# Altium PCB ECUEXT1_23.PcbDoc
Units mm, origin at the board's own origin, x right, y up, seen from the top; angles counter-clockwise.
Board outline 56 x 44.32 mm, 2 copper layers (Top Layer, Bottom Layer); 17 components, 22 nets, 110 pads, 12 vias.
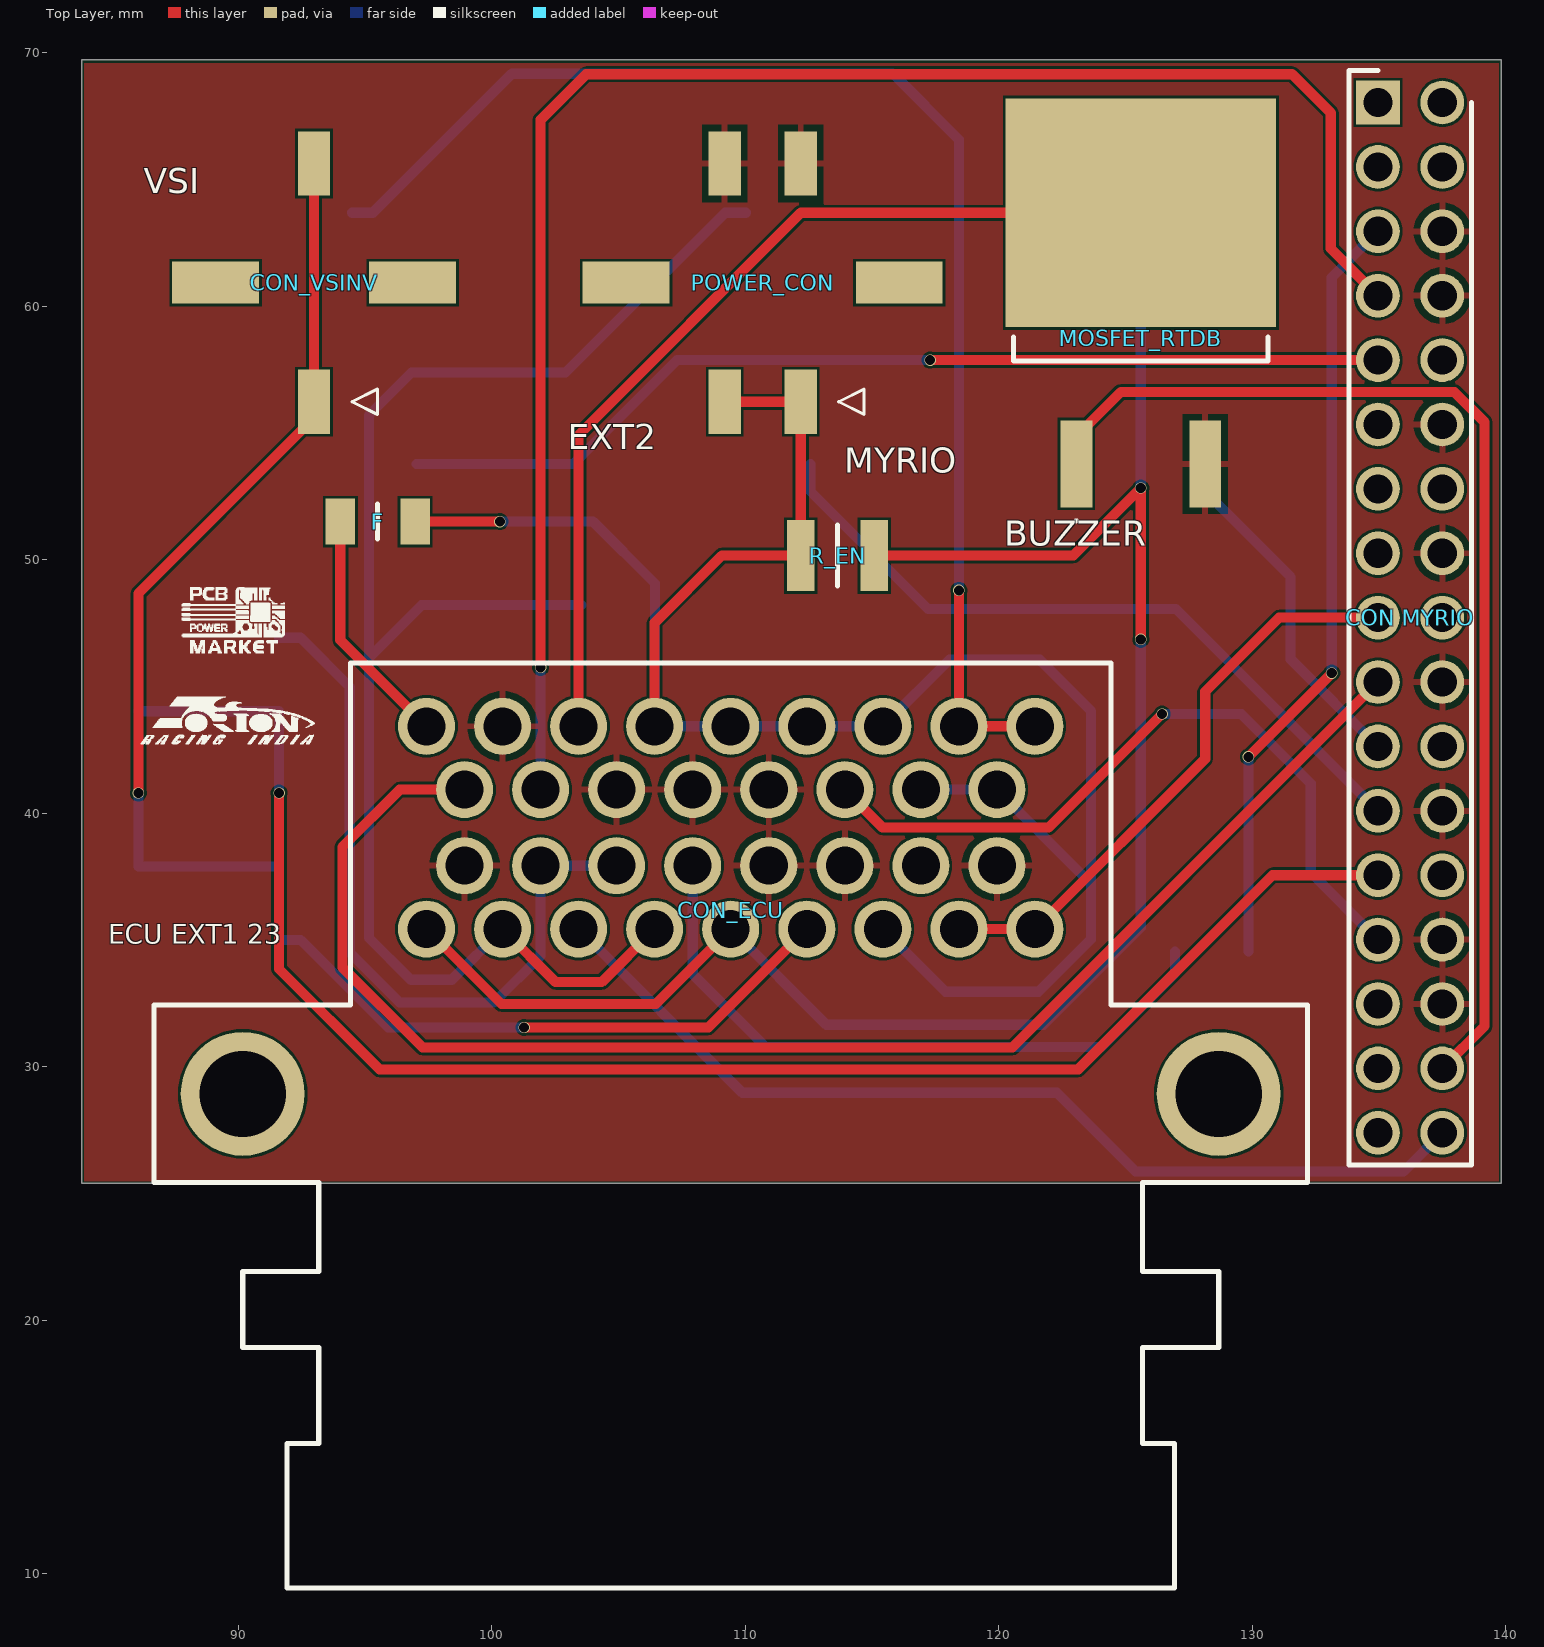
[diagram p0: Top Layer view]
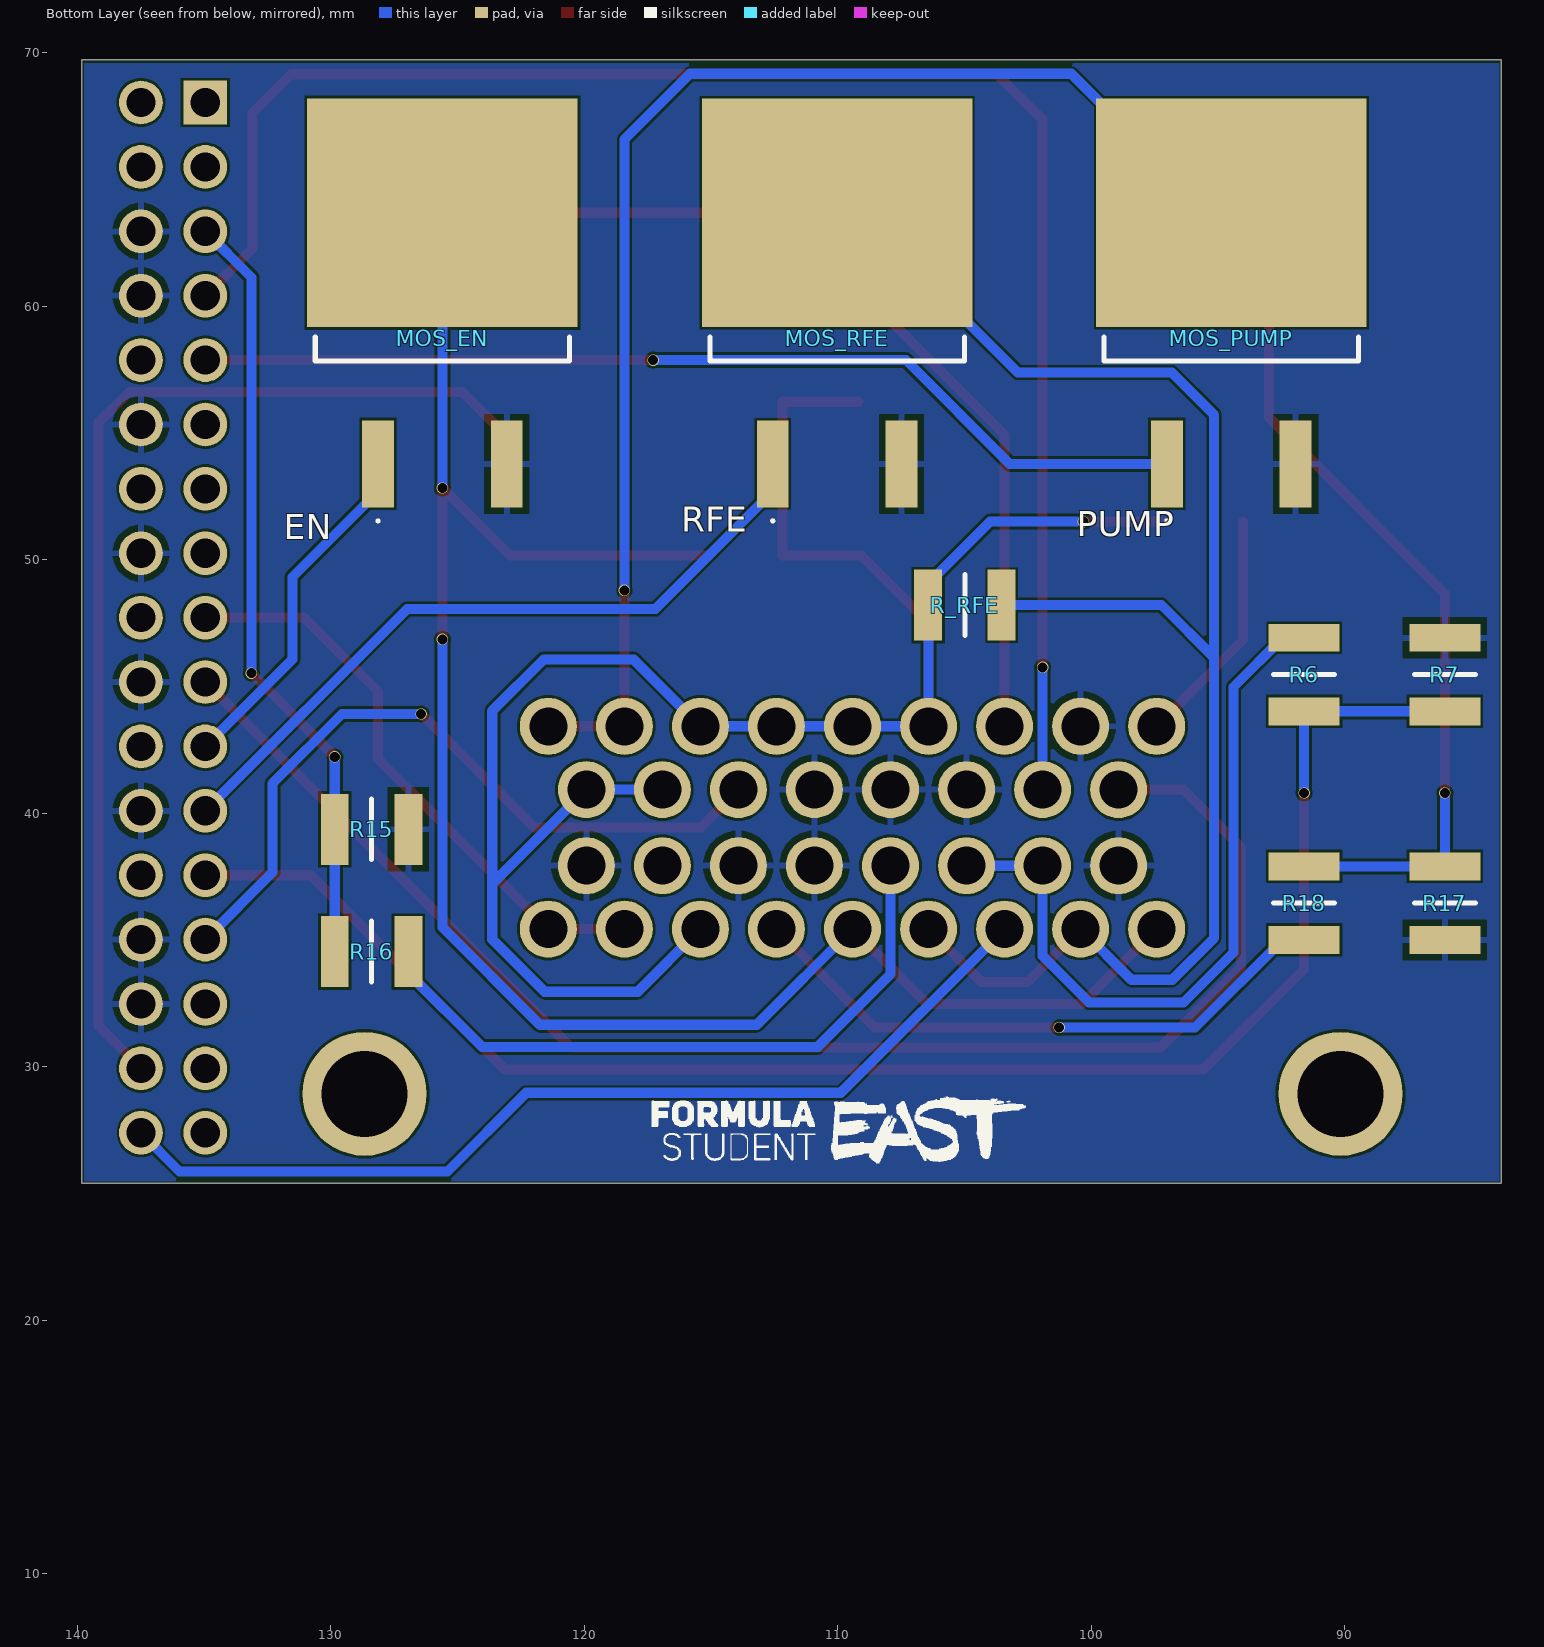
[diagram p1: Bottom Layer view, seen from below]
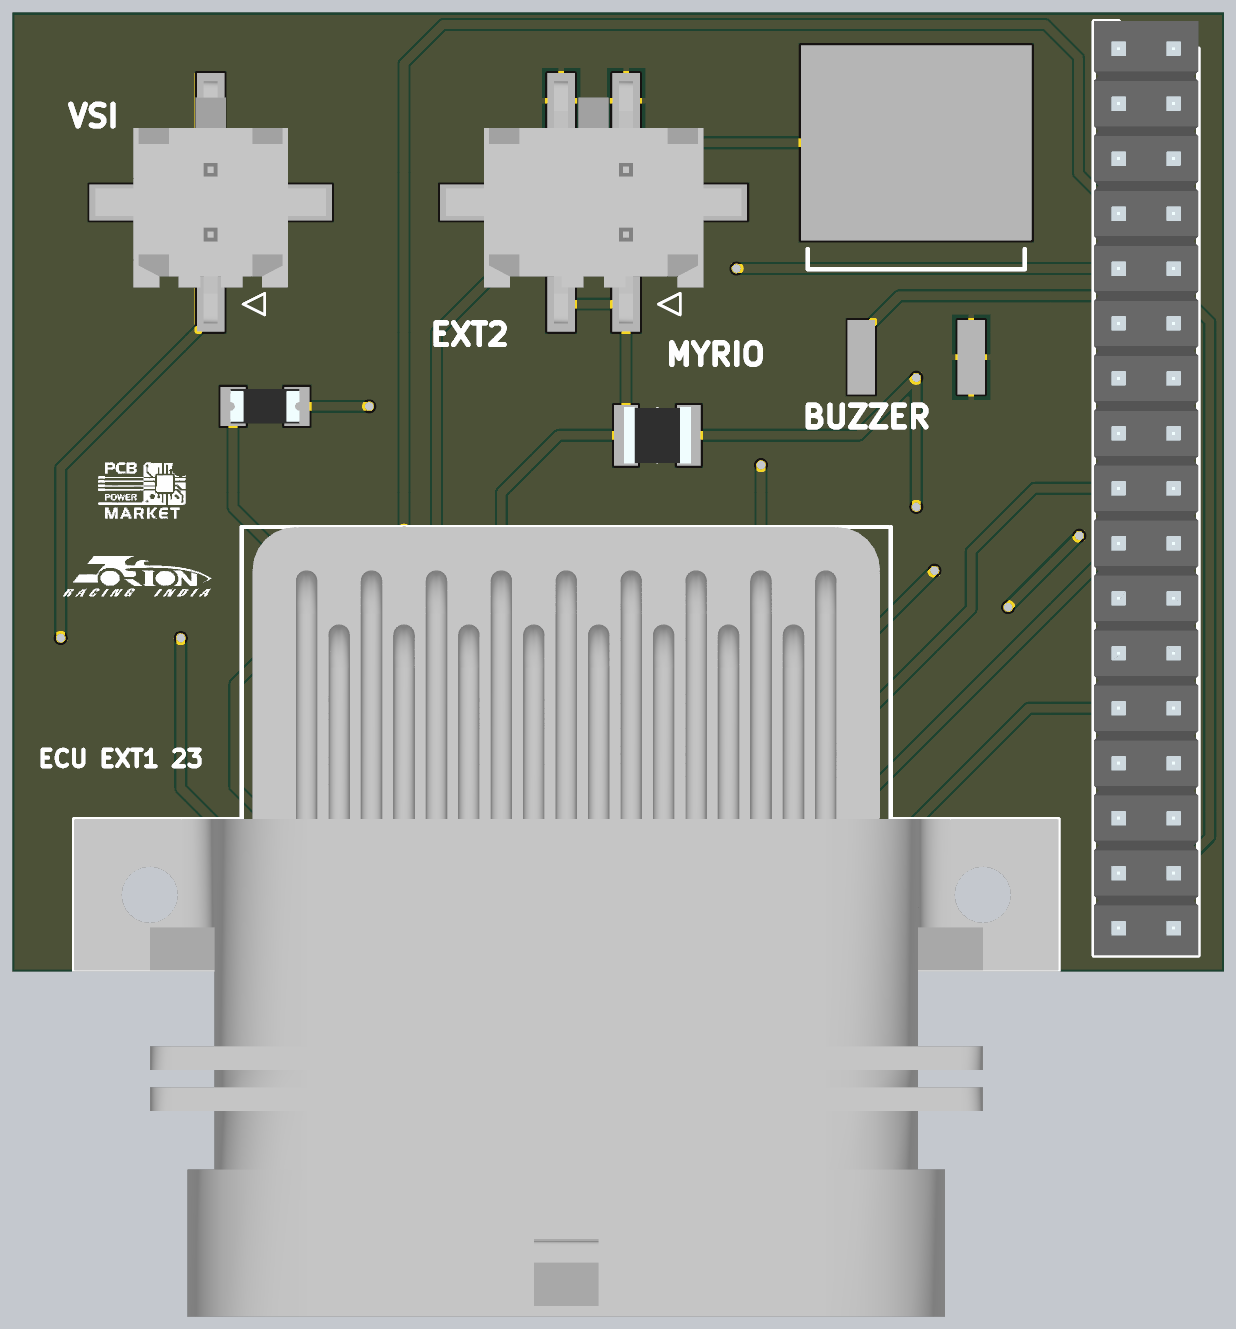
[diagram p2: 3D render of the assembled board from above, using the file's embedded part models]
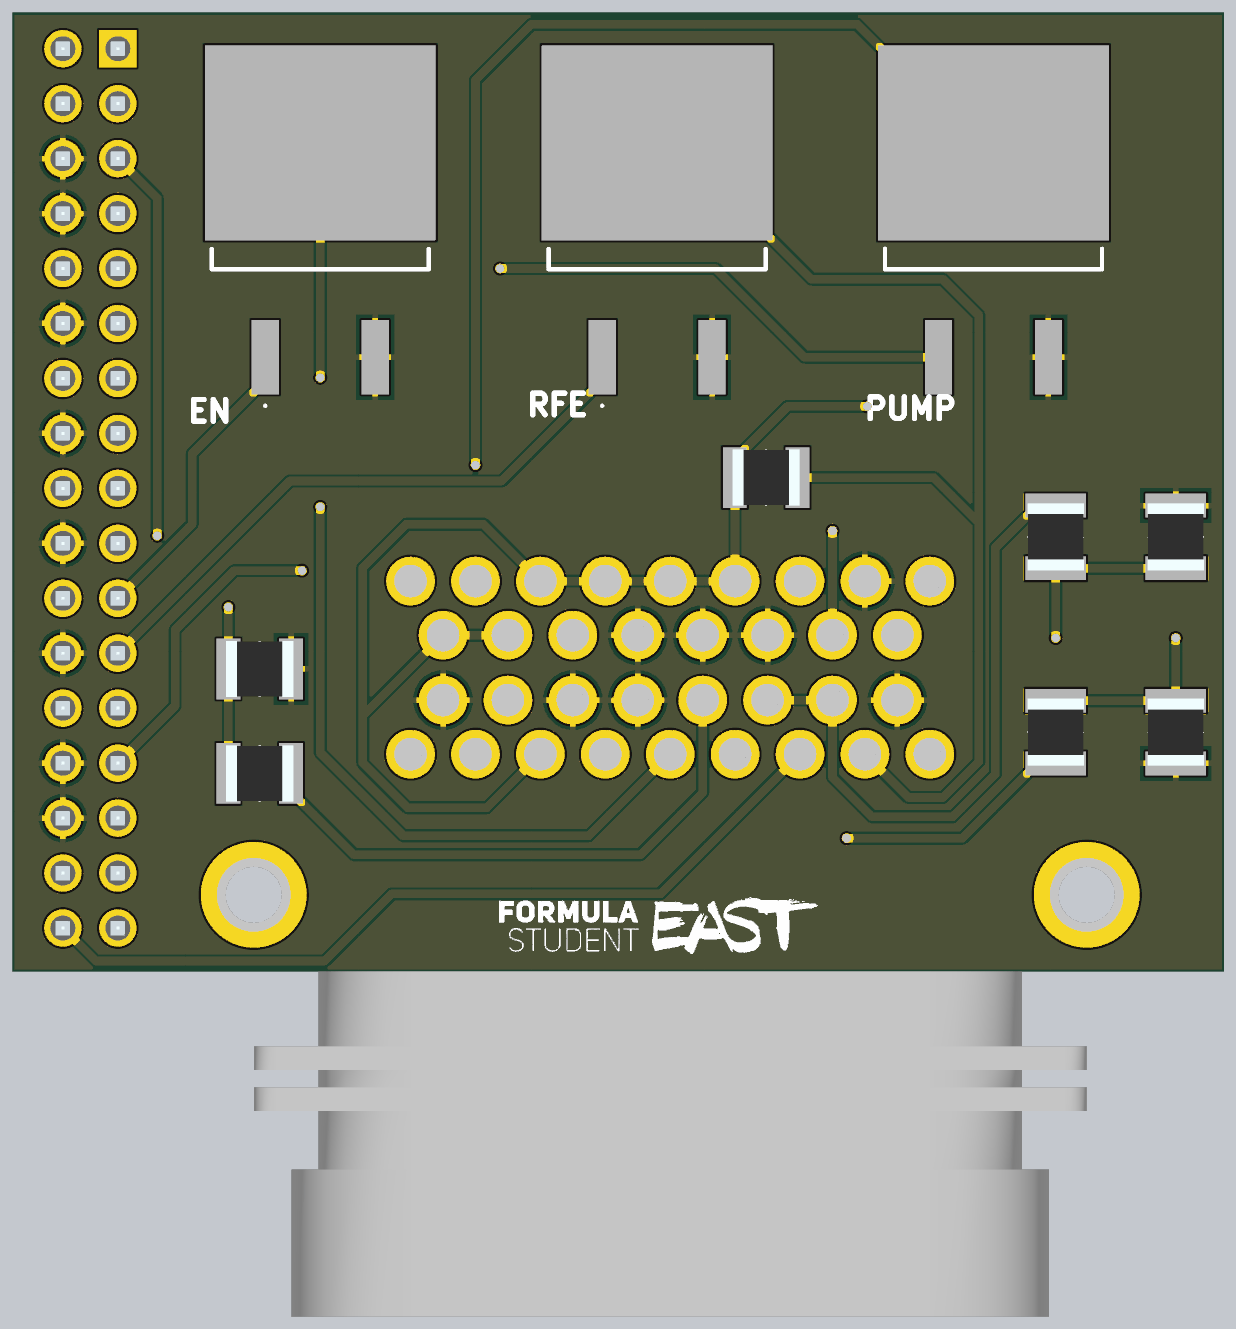
[diagram p3: 3D render of the assembled board from below, using the file's embedded part models]

## Layer stack, top to bottom
Top Solder: solder mask 0.0102, Solder Resist, Dk 3.5
Top Layer: signal copper 0.0356
Dielectric 1: dielectric 0.32, FR-4, Dk 4.8
Bottom Layer: signal copper 0.0356
Bottom Solder: solder mask 0.0102, Solder Resist, Dk 3.5

## Board outline
83.828,25.4 139.827,25.4 139.827,69.723 83.828,69.723

## Design rules (kind name [scope] priority, off if disabled: settings)
Clearance [All] p1: gap=0.1 ignorepadtopadclearanceinfootprint=FALSE
PolygonConnect [All] p1: connectstyle=Relief reliefconductorwidth=0.254 reliefentries=4 polygonreliefangle="90 Angle" airgapwidth=0.254
RoutingVias [All] p1: holewidth=0.4 width=0.45 viastyle="Through Hole" minholewidth=0.4 minwidth=0.45 maxholewidth=0.4 maxwidth=0.45
SolderMaskExpansion [All] p1: expansion=0.102 istentingtop=FALSE
Width [All] p1: maxlimit=0.5 minlimit=0.4 preferedwidth=0.4 minimp=50.000000 maximp=50.000000 favimp=50.000000
30 further rules are at their usual default settings.

## Components (designator, comment, footprint, x,y, rotation, side; value= is the part's Value field where it differs from the comment)
"CON MYRIO" "67997-234HLF" HDRV34W67P254_2X17_4318X483X858P 134.955,68.038 r270 top
CON_ECU "6437288-1" 6437288-1 109.426,45.933 r0 top
CON_VSINV "43045-0218" 43045-02YY_181920 92.989,60.934 r0 top
F "NANOSMDC020F-2" NANOSMDC016F2 95.5,51.507 r0 top
MOS_EN "SUM40010EL-GE3" SUM40010ELGE3 125.602,62.418 r180 bottom
MOS_PUMP "SUM40010EL-GE3" SUM40010ELGE3 94.484,62.418 r180 bottom
MOS_RFE "SUM40010EL-GE3" SUM40010ELGE3 110.031,62.418 r180 bottom
MOSFET_RTDB "SUM40010EL-GE3" SUM40010ELGE3 125.602,62.418 r0 top
POWER_CON "43045-0419" 43045-04YY_181920 110.688,60.934 r0 top
R6 "3.3k" RESC3126X60N 91.609,45.473 r90 bottom
R7 "2.2k" RESC3126X60N 86.06,45.473 r270 bottom
R15 "RC1210JR-0710KL" RESC3126X60N 128.397,39.37 r0 bottom
R16 "RC1210JR-0710KL" RESC3126X60N 128.397,34.544 r180 bottom
R17 "RC1210JR-0710KL" RESC3126X60N 86.06,36.455 r90 bottom
R18 "RC1210JR-0710KL" RESC3126X60N 91.609,36.455 r270 bottom
R_EN "10k" RESC3126X60N 113.638,50.168 r0 top
R_RFE "10k" RESC3126X60N 104.992,48.215 r180 bottom

## Footprints (in the part's own frame and the unit in brackets; to place one, negate y for a bottom-side part, rotate by r counter-clockwise, add the part's x,y. Pads: shape width x height; smd on the part's side, far side on the other; paste and mask are expansions set on the pad)
43045-02YY_181920 [mm]
  rect 1.27x2.54 smd: 1(0,-4.7) 2(0,4.7)
  rect 3.43x1.65 smd: 3(3.885,0) 4(-3.885,0)
  silkscreen extent 1.5,-5.2 2.5,-4.2, body extent -5.33,-5.6 5.33,5.6, height 9.96
43045-04YY_181920 [mm]
  rect 1.27x2.54 smd: 1(1.5,-4.7) 2(-1.5,-4.7) 3(1.5,4.7) 4(-1.5,4.7)
  rect 3.43x1.65 smd: 5(5.385,0) 6(-5.385,0)
  silkscreen extent 3,-5.2 4,-4.2, body extent -6.83,-5.6 6.83,5.6, height 9.96
6437288-1 [mm]
  round 2.25 hole 1.5: 1(-12,-2.5) 2(-9,-2.5) 3(-6,-2.5) 4(-3,-2.5) 5(0,-2.5) 6(3,-2.5) 7(6,-2.5) 8(9,-2.5) 9(12,-2.5) 10(-10.5,-5) 11(-7.5,-5) 12(-4.5,-5) 13(-1.5,-5) 14(1.5,-5) 15(4.5,-5) 16(7.5,-5) 17(10.5,-5) 18(-10.5,-8) 19(-7.5,-8) 20(-4.5,-8) 21(-1.5,-8) 22(1.5,-8) 23(4.5,-8) 24(7.5,-8) 25(10.5,-8) 26(-12,-10.5) 27(-9,-10.5) 28(-6,-10.5) 29(-3,-10.5) 30(0,-10.5) 31(3,-10.5) 32(6,-10.5) 33(9,-10.5) 34(12,-10.5)
  round 4.89 hole 3.4: 35(19.25,-17) 36(-19.25,-17)
  silkscreen extent -22.75,-36.5 22.75,0, body extent -22.75,-36.5 22.75,0, height 28.16
HDRV34W67P254_2X17_4318X483X858P [mm]
  rect 1.725x1.725 hole 1.15: 1(0,0)
  round 1.725 hole 1.15: 2(0,2.54) 3(2.54,0) 4(2.54,2.54) 5(5.08,0) 6(5.08,2.54) 7(7.62,0) 8(7.62,2.54) 9(10.16,0) 10(10.16,2.54) 11(12.7,0) 12(12.7,2.54) 13(15.24,0) 14(15.24,2.54) 15(17.78,0) 16(17.78,2.54) 17(20.32,0) 18(20.32,2.54) 19(22.86,0) 20(22.86,2.54) 21(25.4,0) 22(25.4,2.54) 23(27.94,0) 24(27.94,2.54) 25(30.48,0) 26(30.48,2.54) 27(33.02,0) 28(33.02,2.54) 29(35.56,0) 30(35.56,2.54) 31(38.1,0) 32(38.1,2.54) 33(40.64,0) 34(40.64,2.54)
  silkscreen extent -1.27,-1.14 41.91,3.68, body extent -1.27,-1.14 41.91,3.68, height 8.58
NANOSMDC016F2 [mm]
  rect 1.16x1.81 smd: 1(-1.475,0) 2(1.475,0)
  silkscreen extent 0,-0.69 0,0.69, body extent -1.6,-0.79 1.6,0.79, height 0.82
RESC3126X60N [mm]
  rect 1.1x2.8 smd: 1(-1.45,0) 2(1.45,0)
  silkscreen extent 0,-1.2 0,1.2, body extent -1.55,-1.3 1.55,1.3, height 0.6
SUM40010ELGE3 [mil]
  rect 49.49x135 smd: 1(-100,-340) 3(100,-340)
  rect 420x355 smd: 2(0,50)
  silkscreen extent -197,-430 198,-143

## Part data
"CON MYRIO": "Connector", Manufacturer_Name=Amphenol, Mouser Part Number=649-67997-234HLF, Arrow Part Number=67997-234HLF, Arrow Price/Stock=https://www.arrow.com/en/products/67997-234hlf/amphenol-fci?region=nac, Datasheet Link=https://cdn.amphenol-icc.com/media/wysiwyg/files/drawing/67996.pdf, Height=8.58mm, Manufacturer_Part_Number=67997-234HLF, Mouser Price/Stock=https://www.mouser.co.uk/ProductDetail/Amphenol-FCI/67997-234HLF?qs=zh4O8xspOuxBU73L6U2QCQ%3D%3D
CON_ECU: "Connector", Manufacturer_Name="TE Connectivity", Mouser Part Number=571-6437288-1, Arrow Part Number=6437288-1, Arrow Price/Stock=https://www.arrow.com/en/products/6437288-1/te-connectivity, Datasheet Link=http://www.te.com/commerce/DocumentDelivery/DDEController?Action=srchrtrv&DocNm=6437288-1&DocType=Customer+Drawing&DocLang=Japanese, Manufacturer_Part_Number=6437288-1, Mouser Price/Stock=https://www.mouser.co.uk/ProductDetail/TE-Connectivity/6437288-1?qs=WBj8811fzwGYtKR8aBSJZw%3D%3D
CON_VSINV: "Connector", Manufacturer_Name=Molex, Mouser Part Number=538-43045-0218, Arrow Part Number=43045-0218, Arrow Price/Stock=https://www.arrow.com/en/products/43045-0218/molex, Datasheet Link=https://www.molex.com/pdm_docs/sd/430450218_sd.pdf, Height=9.91mm, Manufacturer_Part_Number=43045-0218, Mouser Price/Stock=https://www.mouser.co.uk/ProductDetail/Molex/43045-0218?qs=4XSMV6Twtb2qUKINalLbdA%3D%3D
F: "Resettable Fuse", Manufacturer_Name=LITTELFUSE, Mouser Part Number=650-NANOSMDC020F-2, Arrow Part Number=NANOSMDC020F-2, Arrow Price/Stock=https://www.arrow.com/en/products/nanosmdc020f-2/littelfuse, Datasheet Link=https://www.littelfuse.com/~/media/electronics/datasheets/resettable_ptcs/littelfuse_ptc_nanosmdc_datasheet.pdf.pdf, Height=1mm, Manufacturer_Part_Number=NANOSMDC020F-2, Mouser Price/Stock=https://www.mouser.co.uk/ProductDetail/Littelfuse/NANOSMDC020F-2?qs=iK0evp%252BCRRU6agwMt7HYjg%3D%3D
MOS_EN MOS_PUMP MOS_RFE MOSFET_RTDB: "MOSFET (N-Channel)", Manufacturer_Name=Vishay, Mouser Part Number=78-SUM40010EL-GE3, Arrow Part Number=SUM40010EL-GE3, Arrow Price/Stock=https://www.arrow.com/en/products/sum40010el-ge3/vishay, Datasheet Link=https://www.vishay.com/docs/66984/sum40010el.pdf, Height=5.08mm, Manufacturer_Part_Number=SUM40010EL-GE3, Mouser Price/Stock=https://www.mouser.com/Search/Refine.aspx?Keyword=78-SUM40010EL-GE3
POWER_CON: "Connector", Manufacturer_Name=Molex, Mouser Part Number=538-43045-0419, Datasheet Link=https://www.molex.com/pdm_docs/sd/430450218_sd.pdf, Height=9.91mm, Manufacturer_Part_Number=43045-0419, Mouser Price/Stock=https://www.mouser.co.uk/ProductDetail/Molex/43045-0419?qs=UeCeOHRHQebVNIQyI9VWWg%3D%3D
R6 R7 R_EN R_RFE: library part RC1210JR-0710KL, "Resistor", Manufacturer_Name="YAGEO (PHYCOMP)", Mouser Part Number=603-RC1210JR-0710KL, Arrow Part Number=RC1210JR-0710KL, Arrow Price/Stock=https://www.arrow.com/en/products/rc1210jr-0710kl/yageo, Datasheet Link=https://datasheet.datasheetarchive.com/originals/distributors/Datasheets_SAMA/902f9e387b938f871d31120f5fc1d65e.pdf, Height=0.6mm, Manufacturer_Part_Number=RC1210JR-0710KL, Mouser Price/Stock=https://www.mouser.co.uk/ProductDetail/YAGEO/RC1210JR-0710KL?qs=6sj9KdP9svgfoubno5Jb%252BA%3D%3D
R15 R16 R17 R18: "Resistor", Manufacturer_Name="YAGEO (PHYCOMP)", Mouser Part Number=603-RC1210JR-0710KL, Arrow Part Number=RC1210JR-0710KL, Arrow Price/Stock=https://www.arrow.com/en/products/rc1210jr-0710kl/yageo, Datasheet Link=https://datasheet.datasheetarchive.com/originals/distributors/Datasheets_SAMA/902f9e387b938f871d31120f5fc1d65e.pdf, Height=0.6mm, Manufacturer_Part_Number=RC1210JR-0710KL, Mouser Price/Stock=https://www.mouser.co.uk/ProductDetail/YAGEO/RC1210JR-0710KL?qs=6sj9KdP9svgfoubno5Jb%252BA%3D%3D

## Via types
v1: diameter 0.45, hole 0.4, Top Layer to Bottom Layer, 12 vias

## Nets (pads, with @x,y where several pads share a name; then routed paths per layer and width w, separated by ;. In a path a pad name is that pad's centre, name@x,y a point inside that pad or via, vN(x,y) a via of type N, cw(c..) or ccw(c..) an arc to the next point about the centre after c; other vN are vias at no path point)
+12: CON_ECU.4 CON_ECU.5 CON_ECU.6 CON_ECU.7 CON_ECU.16 CON_ECU.17 CON_ECU.32 F.2 POWER_CON.1 POWER_CON.2 R_EN.1 R_RFE.1 | length 82.6
  Top Layer w0.4: F.2 v1(100.319,51.507) ; CON_ECU.4 106.426,47.517 109.077,50.168 R_EN.1 POWER_CON.1 ; POWER_CON.2 POWER_CON.1
  Bottom Layer w0.4: v1(100.319,51.507) 104,51.507 106.442,49.065 R_RFE.1 106.434,48.207 106.434,43.441 CON_ECU.4 CON_ECU.5 CON_ECU.6 CON_ECU.7 118.054,46.061 121.616,46.061 123.636,44.041 123.636,37.223 ; CON_ECU.32 117.899,32.96 121.57,32.96 123.636,35.026 123.636,37.223 ; CON_ECU.16 CON_ECU.17 123.636,37.223
AI2: "CON MYRIO.27" CON_ECU.15 | length 29.2
  Top Layer w0.4: CON_ECU.15 115.423,39.436 121.961,39.436 v1(126.441,43.917)
  Bottom Layer w0.4: v1(126.441,43.917) 129.565,43.917 132.309,41.173 132.309,37.664 134.955,35.018
AI3/BAMOCAR: "CON MYRIO.25" R6.1 R7.2 | length 63.9
  Top Layer w0.4: v1(91.609,40.8) 91.609,33.857 95.568,29.898 123.138,29.898 130.798,37.558 134.955,37.558
  Bottom Layer w0.4: R7.2 86.91,44.023 R6.1 v1(91.609,40.8)
AO0/APPS: "CON MYRIO.34" CON_ECU.28 | length 38.7
  Bottom Layer w0.4: CON_ECU.28 109.884,28.975 122.296,28.975 125.398,25.873 135.97,25.873 137.495,27.398
AO1/RTD_BUZZER: "CON MYRIO.32" MOSFET_RTDB.1 | length 44.6
  Top Layer w0.4: MOSFET_RTDB.1 123.062,54.868 124.815,56.621 137.968,56.621 139.164,55.425 139.164,31.607 137.495,29.938
BUZZER: CON_ECU.3 MOSFET_RTDB.2 | length 37.3
  Top Layer w0.4: CON_ECU.3 103.426,54.923 112.191,63.688 MOSFET_RTDB.2
DIO0/RFE: "CON MYRIO.23" MOS_RFE.1 | length 28.7
  Bottom Layer w0.4: MOS_RFE.1 112.571,52.696 117.207,48.06 126.993,48.06 134.955,40.098
DIO1/EN: "CON MYRIO.21" MOS_EN.1 | length 14
  Bottom Layer w0.4: MOS_EN.1 128.142,52.696 131.514,49.324 131.514,46.079 134.955,42.638
DIO2/RTD_BUTTON: "CON MYRIO.19" CON_ECU.10 | length 58.6
  Top Layer w0.4: CON_ECU.10 96.367,40.933 94.106,38.672 94.106,33.926 97.266,30.766 120.543,30.766 134.955,45.178
DIO3/RTD_BRAKE: "CON MYRIO.17" CON_ECU.33 CON_ECU.34 | length 23.2
  Top Layer w0.4: CON_ECU.33 CON_ECU.34 128.143,42.15 128.143,44.806 131.055,47.718 134.955,47.718
DIO8/PUMP_OUT: "CON MYRIO.9" MOS_PUMP.1 | length 39.6
  Top Layer w0.4: v1(117.29,57.878) 134.955,57.878
  Bottom Layer w0.4: MOS_PUMP.1 103.22,53.782 107.316,57.878 v1(117.29,57.878)
DIO9/PUMP_CONTROL: "CON MYRIO.7" CON_ECU.11 | length 67
  Top Layer w0.4: v1(101.926,45.757) 101.926,67.357 103.723,69.154 131.573,69.154 133.096,67.631 133.096,62.277 134.955,60.418
  Bottom Layer w0.4: CON_ECU.11 v1(101.926,45.757)
EN: CON_ECU.26 CON_ECU.30 MOS_EN.2 R_EN.2 | length 73.6
  Top Layer w0.4: CON_ECU.26 100.381,32.478 106.471,32.478 CON_ECU.30 ; R_EN.2 122.939,50.168 v1@125.592,52.821 ; v1(125.602,46.861) v1(125.602,52.831)
  Bottom Layer w0.4: CON_ECU.30 113.2,31.659 121.759,31.659 125.602,35.502 v1(125.602,46.861) ; v1(125.602,52.831) MOS_EN.2
GND: "CON MYRIO.6" "CON MYRIO.8" "CON MYRIO.12" "CON MYRIO.16" "CON MYRIO.20" "CON MYRIO.24" "CON MYRIO.28" "CON MYRIO.30" CON_ECU.2 CON_ECU.12 CON_ECU.13 CON_ECU.14 CON_ECU.18 CON_ECU.22 CON_ECU.23 CON_ECU.25 MOS_EN.3 MOS_PUMP.3 MOS_RFE.3 MOSFET_RTDB.3 POWER_CON.3 POWER_CON.4 R7.1 R15.1 R17.1
PUMP: CON_ECU.8 CON_ECU.9 MOS_PUMP.2 | length 53.4
  Top Layer w0.4: v1(118.426,48.794) CON_ECU.8 CON_ECU.9
  Bottom Layer w0.4: MOS_PUMP.2 95.309,63.688 100.793,69.172 115.833,69.172 118.426,66.579 v1(118.426,48.794)
PUMP_BAMOCAR: CON_ECU.19 CON_ECU.20 R6.2 | length 29.7
  Bottom Layer w0.4: R6.2 92.459,46.923 94.397,44.985 94.397,34.508 96.369,32.536 100.091,32.536 101.926,34.371 CON_ECU.19 CON_ECU.20
RFE: CON_ECU.27 CON_ECU.29 MOS_RFE.2 R_RFE.2 | length 62.6
  Top Layer w0.4: CON_ECU.27 102.519,33.34 104.333,33.34 CON_ECU.29
  Bottom Layer w0.4: CON_ECU.27 98.426,33.433 96.81,33.433 95.16,35.083 95.16,46.138 ; R_RFE.2 97.237,48.215 95.16,46.138 ; MOS_RFE.2 109.205,63.688 102.905,57.388 96.834,57.388 95.16,55.714 95.16,46.138
SPARE: CON_ECU.21 R16.2 | length 26.5
  Bottom Layer w0.4: CON_ECU.21 107.926,33.656 110.795,30.787 124.04,30.787 126.947,33.694 R16.2
SPARE5V: "CON MYRIO.5" R15.2 R16.1 | length 30.5
  Top Layer w0.4: v1(129.847,42.227) 129.847,42.234 133.135,45.522 v1(133.135,45.528)
  Bottom Layer w0.4: R16.1 R15.2 v1(129.847,42.227) ; v1(133.135,45.528) 133.135,61.138 134.955,62.958
SUPPLY: CON_ECU.1 F.1 | length 9.5
  Top Layer w0.4: F.1 94.025,46.834 CON_ECU.1
VS_INV_CONNECTOR: CON_ECU.31 R18.2 | length 23.9
  Top Layer w0.4: v1(101.273,31.55) 108.543,31.55 CON_ECU.31
  Bottom Layer w0.4: R18.2 92.459,35.005 95.914,31.55 v1(101.273,31.55)
VS_INV_IN: CON_VSINV.1 CON_VSINV.2 R17.2 R18.1 | length 36.1
  Top Layer w0.4: v1(86.06,40.8) 86.06,48.67 92.989,55.599 CON_VSINV.1 CON_VSINV.2
  Bottom Layer w0.4: v1(86.06,40.8) R17.2 R18.1@91.609,37.905
pads on no net: "CON MYRIO.1" "CON MYRIO.2" "CON MYRIO.3" "CON MYRIO.4" "CON MYRIO.10" "CON MYRIO.11" "CON MYRIO.13" "CON MYRIO.14" "CON MYRIO.15" "CON MYRIO.18" "CON MYRIO.22" "CON MYRIO.26" "CON MYRIO.29" "CON MYRIO.31" "CON MYRIO.33" CON_ECU.24 CON_ECU.35 CON_ECU.36 CON_VSINV.3 CON_VSINV.4 POWER_CON.5 POWER_CON.6

## Polygon pours and split planes (outlines as drawn)
GND on Bottom Layer "NONET_L-01_P-001" (solid, pour order 1): 139.725,25.476 139.725,69.596 83.922,69.596 83.922,25.476
GND on Top Layer "NONET_L-01_P-001" (solid, pour order 0): 139.725,69.596 139.725,25.476 83.922,25.476 83.922,69.596

## Silkscreen, mask and mechanical layers (free items; w line width, h text height)
Top Overlay:
  drawing of 48 lines, arcs and shapes, not listed
  text "VSI" at 86.263,64.453 h1
  text "EXT2" at 103.003,54.354 h1
  text "MYRIO" at 113.899,53.435 h1
  text "BUZZER" at 120.211,50.549 h1
  text "ECU EXT1 23" at 84.872,34.863 h0.76
Bottom Overlay:
  drawing of 17 lines, arcs and shapes, not listed
  text "RFE" at 116.184,51.107 h1
  text "PUMP" at 100.587,50.934 h1
  text "EN" at 131.855,50.811 h1